# EAGLE board Flight Controller (EAGLE 9.5.0)
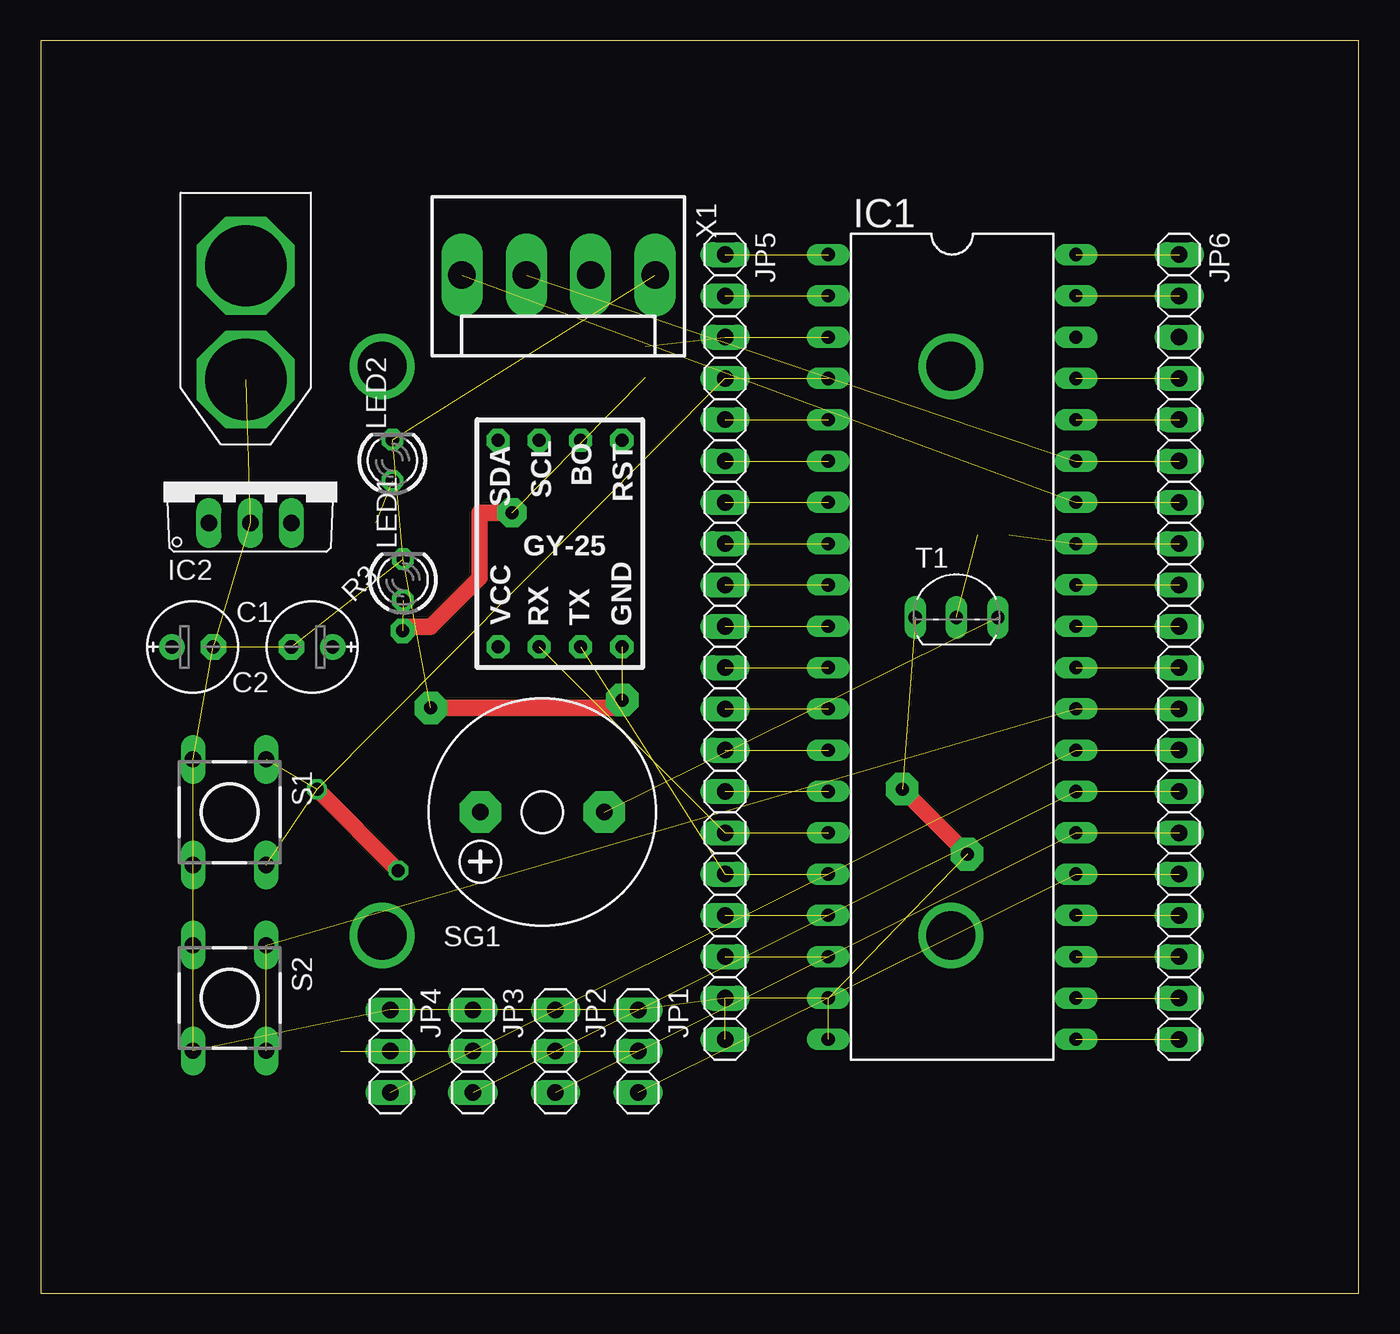
[diagram p0: board, top side]
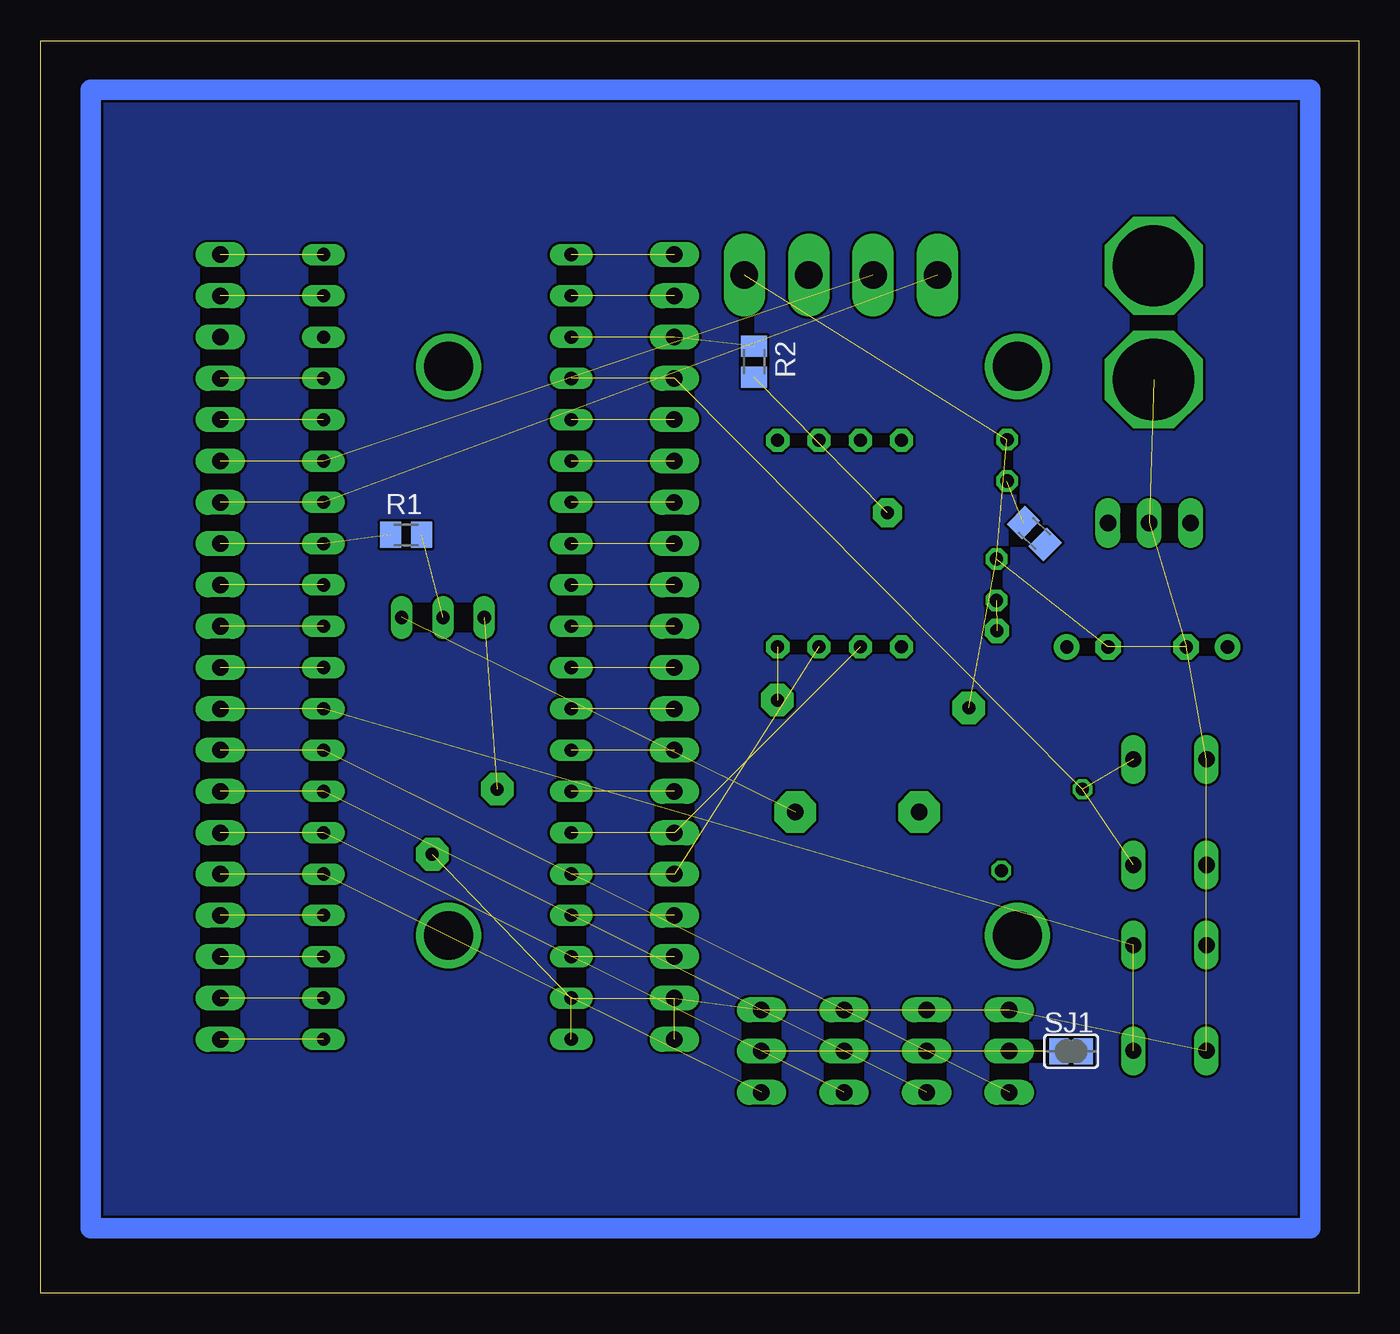
[diagram p1: board, bottom side, seen from below]

Size 81.09 x 77.03 mm. Coordinates in mm from the lower left corner, seen from the top.
Outline: 0,0 81.09,0 81.09,77.03 0,77.03 0,0
Copper layers (1*16): Top 0.035mm / dielectric 1.5mm / Bottom 0.035mm
Design rules "default": minimum track width 6mil, minimum drill 0.35mm, track to track 6mil, track to pad 6mil, pad to pad 6mil, via to via 6mil, smd to smd 6mil, copper to edge 40mil, drill to drill 6mil, minimum pad ring 10mil, minimum via ring 8mil, stop-mask expansion 4mil, vias tented up to drill 0mil, thermal gap 10mil

## Footprints (pad centres in the part's own frame; a part is rotated, then mirrored left to right if it is on the bottom)
E2,5-6E = drill 0.813 pad 1.575: + -1.27,0 | drill 0.813 pad 1.575 octagon: - 1.27,0
GY-25_INV = drill 0.8 pad 1.422 octagon: BO 6.35,-1.27; GND -6.35,-3.81; RST 6.35,-3.81; RX -6.35,1.27; SCL 6.35,1.27; SDA 6.35,3.81; TX -6.35,-1.27; VCC -6.35,3.81
DIL40 = drill 0.813 long: 1 -24.13,-7.62; 2 -21.59,-7.62; 3 -19.05,-7.62; 4 -16.51,-7.62; 5 -13.97,-7.62; 6 -11.43,-7.62; 7 -8.89,-7.62; 8 -6.35,-7.62; 9 -3.81,-7.62; 10 -1.27,-7.62; 11 1.27,-7.62; 12 3.81,-7.62; 13 6.35,-7.62; 14 8.89,-7.62; 15 11.43,-7.62; 16 13.97,-7.62; 17 16.51,-7.62; 18 19.05,-7.62; 19 21.59,-7.62; 20 24.13,-7.62; 21 24.13,7.62; 22 21.59,7.62; 23 19.05,7.62; 24 16.51,7.62; 25 13.97,7.62; 26 11.43,7.62; 27 8.89,7.62; 28 6.35,7.62; 29 3.81,7.62; 30 1.27,7.62; 31 -1.27,7.62; 32 -3.81,7.62; 33 -6.35,7.62; 34 -8.89,7.62; 35 -11.43,7.62; 36 -13.97,7.62; 37 -16.51,7.62; 38 -19.05,7.62; 39 -21.59,7.62; 40 -24.13,7.62
TO220V = drill 1.016 long: 1 -2.54,-2.54; 2 0,-2.54; 3 2.54,-2.54
1X03 = drill 1.016 long: 1 -2.54,0; 2 0,0; 3 2.54,0
1X20 = drill 1.016 long: 1 -24.13,0; 2 -21.59,0; 3 -19.05,0; 4 -16.51,0; 5 -13.97,0; 6 -11.43,0; 7 -8.89,0; 8 -6.35,0; 9 -3.81,0; 10 -1.27,0; 11 1.27,0; 12 3.81,0; 13 6.35,0; 14 8.89,0; 15 11.43,0; 16 13.97,0; 17 16.51,0; 18 19.05,0; 19 21.59,0; 20 24.13,0
LED3MM = drill 0.813 octagon: A -1.27,0; K 1.27,0
M0805 = smd 1.3 x 1.6: 1 -0.95,0; 2 0.95,0
DTS-6 = drill 1 long: 1 -3.25,2.25; 2 3.25,2.25; 3 -3.25,-2.25; 4 3.25,-2.25
F/CM12P = drill 1.016 pad 2.54 octagon: + 3.81,0; - -3.81,0
SJ = smd 1.168 x 1.6: 1 -0.762,0; 2 0.762,0
TO92-EBC = drill 0.813 long: B 0,-1.27; C 2.54,-1.27; E -2.54,-1.27
XT60 = drill 5 octagon: + 4.5,0; - 11.5,0
KK-156-4 = drill 1.7 pad 2.184 long: 1 -5.94,0; 2 -1.98,0; 3 1.98,0; 4 5.94,0

## Placement (x,y rotation side)
C1  [E2,5-6E]  9.35,39.75 0 top
C2  [E2,5-6E]  16.7,39.75 180 top
GY-1  GY-25GY-25_INV  [GY-25_INV]  31.94,46.1 90 top
IC1  BLUEPILL455  [DIL40]  56.07,39.75 270 top
IC2  7805TV  [TO220V]  12.89,49.91 0 top
JP1  [1X03]  36.75,14.89 270 top
JP2  [1X03]  31.67,14.89 270 top
JP3  [1X03]  26.59,14.89 270 top
JP4  [1X03]  21.51,14.89 270 top
JP5  [1X20]  42.1,39.75 270 top
JP6  [1X20]  70.04,39.75 270 top
LED1  [LED3MM]  22.29,43.88 90 top
LED2  [LED3MM]  21.64,51.22 90 top
R1  [M0805]  58.61,46.64 0 bottom
R2  [M0805]  37.2,57.29 270 bottom
R3  [M0805]  19.96,46.72 135 bottom
S1  DTS-6  [DTS-6]  11.62,29.59 270 top
S2  DTS-6  [DTS-6]  11.62,18.16 270 top
SG1  F/CM12P  [F/CM12P]  30.86,29.59 180 top
SJ1  [SJ]  17.7,14.89 0 bottom
T1  [TO92-EBC]  56.34,42.83 0 top
U$1  XT60  [XT60]  12.62,67.69 270 top
X1  [KK-156-4]  31.86,62.61 180 top

## Library data of the parts
C1 C2 = rcl; SPICEPREFIX: C
GY-1 = GY-25
IC1 = STM32BluePill; 0: x; MF: BluePill; MPN: BluePill; X: 0
IC2 = linear
JP1-JP6 = pinhead
LED1 LED2 = led
R1-R3 = rcl; SPICEPREFIX: R
S1 S2 = switch-tact
SG1 = buzzer; OC_FARNELL: unknown; OC_NEWARK: unknown
SJ1 = jumper
T1 = transistor
U$1 = XT60
X1 = con-molex; MF: MOLEX; OC_FARNELL: unknown; OC_NEWARK: unknown

## Nets
BUTTON1: IC1.4 JP5.4 S1.1 S1.2
BUTTON2: IC1.29 JP6.12 S2.1 S2.2
GND: C1.- C2.- GY-1.GND IC1.19 IC1.20 IC2.2 JP1.1 JP2.1 JP3.1 JP4.1 JP5.19 JP5.20 LED1.K LED2.K S1.3 S1.4 S2.3 S2.4 T1.E U$1.- X1.1
GND2: IC1.39 JP6.2
IMU_RX: GY-1.RX IC1.15 JP5.15
IMU_TX: GY-1.TX IC1.16 JP5.16
LED1: IC1.3 JP5.3 R2.1
N$2: SG1.- T1.C
N$3: IC1.18 JP5.18
N$4: R1.2 T1.B
N$5: IC1.17 JP5.17
N$6: IC1.14 JP5.14
N$7: IC1.13 JP5.13
N$8: IC1.12 JP5.12
N$9: IC1.11 JP5.11
N$10: IC1.10 JP5.10
N$11: IC1.9 JP5.9
N$12: IC1.8 JP5.8
N$13: IC1.7 JP5.7
N$14: IC1.6 JP5.6
N$15: IC1.5 JP5.5
N$16: LED1.A R2.2
N$17: LED2.A R3.2
N$18: IC1.2 JP5.2
N$19: IC1.1 JP5.1
N$20: IC1.40 JP6.1
N$22: IC1.37 JP6.4
N$23: IC1.36 JP6.5
N$24: JP1.2 JP2.2 JP3.2 JP4.2 SJ1.1
N$25: IC1.32 JP6.9
N$26: IC1.31 JP6.10
N$27: IC1.30 JP6.11
N$29: IC1.24 JP6.17
N$30: IC1.23 JP6.18
N$31: IC1.22 JP6.19
N$32: IC1.21 JP6.20
PIN_BUZZER: IC1.33 JP6.8 R1.1
PWM1: IC1.25 JP1.3 JP6.16
PWM2: IC1.26 JP2.3 JP6.15
PWM3: IC1.27 JP3.3 JP6.14
PWM4: IC1.28 JP4.3 JP6.13
RECEIVER_RX: IC1.35 JP6.6 X1.3
RECEIVER_TX: IC1.34 JP6.7 X1.4
S$5: R3.1

## Tracks (layer width: path | path; a pad name or v marks a point on that pad's centre or on a via)
A'
  pour Bottom: 3,74 78,74 78,4 3,4
BUTTON1  (via drill 0.8)  (4 unrouted)
  Top 1.016: v22,26 v17,31
BUTTON2  (3 unrouted)
GND  (via drill 0.8 pad 2)  (22 unrouted)
  Top 1.016: v53,31 v57,27 | v35.77,36.48 35.29,36 v24,36
GND2  (1 unrouted)
IMU_RX  (2 unrouted)
IMU_TX  (2 unrouted)
LED1  (2 unrouted)
N$2  (1 unrouted)
N$3  (1 unrouted)
N$4  (1 unrouted)
N$5  (1 unrouted)
N$6  (1 unrouted)
N$7  (1 unrouted)
N$8  (1 unrouted)
N$9  (1 unrouted)
N$10  (1 unrouted)
N$11  (1 unrouted)
N$12  (1 unrouted)
N$13  (1 unrouted)
N$14  (1 unrouted)
N$15  (1 unrouted)
N$16  (via drill 0.8 pad 1.5, 0.8 pad 1.8)  (2 unrouted)
  Top 1.016: v22.27,40.73 22.53,41 24,41 27,44 27,48 v29,48
N$17  (1 unrouted)
N$18  (1 unrouted)
N$19  (1 unrouted)
N$20  (1 unrouted)
N$21
  Bottom 1.27: 3,74 3,4 78,4 78,74 3,74
N$22  (1 unrouted)
N$23  (1 unrouted)
N$24  (4 unrouted)
N$25  (1 unrouted)
N$26  (1 unrouted)
N$27  (1 unrouted)
N$28  (via drill 3)
  other vias: 21,22
N$29  (1 unrouted)
N$30  (1 unrouted)
N$31  (1 unrouted)
N$32  (1 unrouted)
N$33  (via drill 3)
  other vias: 21,57
N$34  (via drill 3)
  other vias: 56,57
N$35  (via drill 3)
  other vias: 56,22
PIN_BUZZER  (2 unrouted)
PWM1  (2 unrouted)
PWM2  (2 unrouted)
PWM3  (2 unrouted)
PWM4  (2 unrouted)
RECEIVER_RX  (2 unrouted)
RECEIVER_TX  (2 unrouted)